# EAGLE board MicroMod_Asset_Tracker_Firmware_Update_Tool-Panel (EAGLE 9.6.2), part 1 of 2
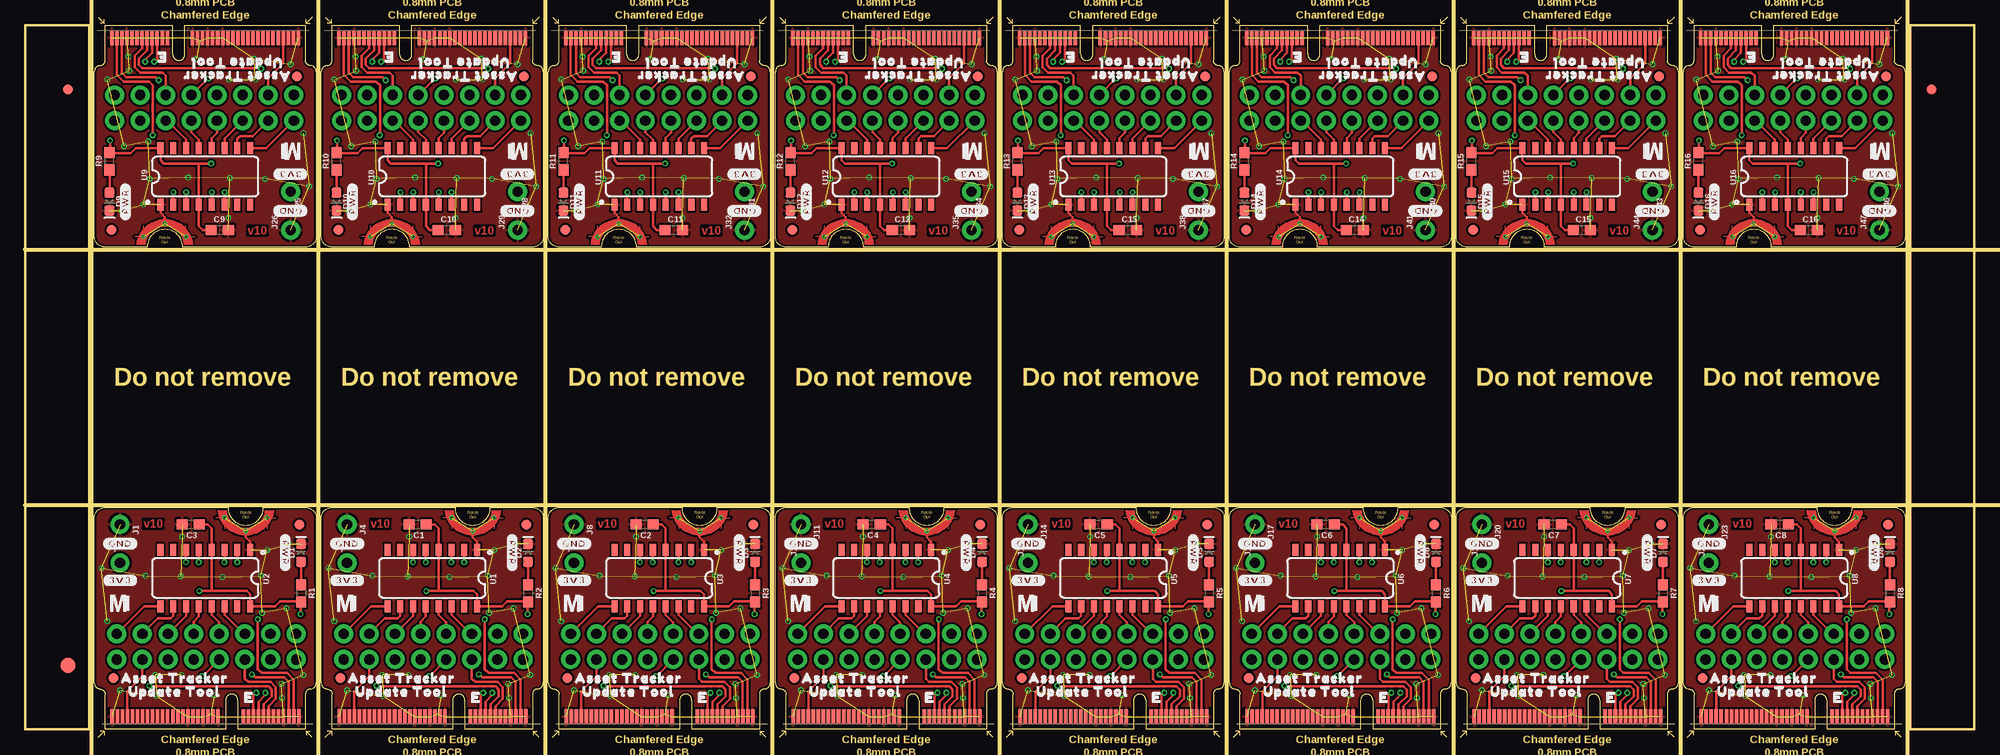
[diagram p0: board, top side]
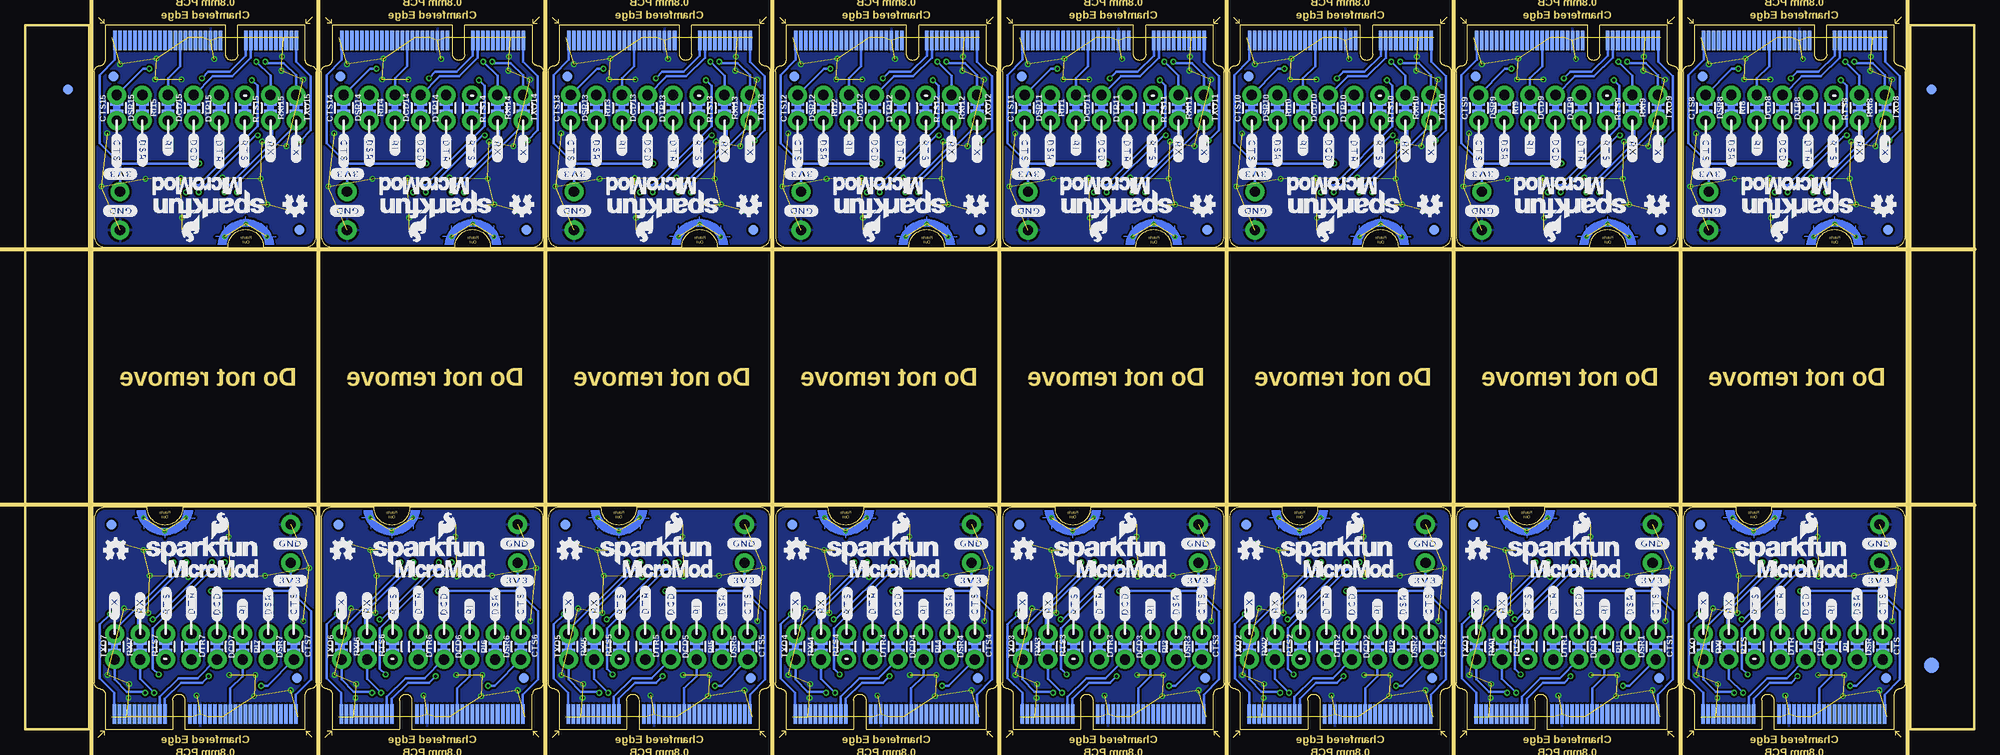
[diagram p1: board, bottom side, seen from below]

Size 193.27 x 69.85 mm. Coordinates in mm from the lower left corner, seen from the top.
Outline: 328 segments
Copper layers (1+2*15+16): Top 0.035mm / dielectric 0.2mm / Route2 0.0175mm / dielectric 1.065mm / Route15 0.0175mm / dielectric 0.2mm / Bottom 0.035mm
Design rules "MicroMod_Asset_Tracker_Firmware_Update_Tool": minimum track width 5mil, minimum drill 0.2mm, track to track 5mil, track to pad 0.2mm, pad to pad 5mil, via to via 0.2mm, smd to smd 0mil, copper to edge 0.2mm, drill to drill 10mil, minimum pad ring 0.13mm, minimum via ring 0.13mm, stop-mask expansion 0.05mm, vias tented up to drill 25mil, thermal gap 10mil
Net classes: 1 power: width 0.178 mm
Milling: 11 lines

## Footprints (pad centres in the part's own frame; a part is rotated, then mirrored left to right if it is on the bottom)
0603 = smd 1.1 x 1: 1 -0.85,0; 2 0.85,0
COMBO-JUMPER_2_NC_TRACE = smd 0.635 x 1.27: 1 -0.508,0; 2 0.508,0 | drill 1.016 pad 1.88: 3 -1.27,0; 4 1.27,0
LED-0603 = smd 1 x 1: A -0.877,0; C 0.877,0
FIDUCIAL-1X2 = smd 1 x 1: 1 0,0
FIDUCIAL-1.5X3 = smd 1.5 x 1.5: 1 0,0
1X01_NO_SILK = drill 1.016 pad 1.88: 1 0,0
M.2-CARD-E-22 = smd 0.35 x 1.45: 1 9.25,1.275; 3 8.75,1.275; 5 8.25,1.275; 7 7.75,1.275; 9 7.25,1.275; 11 6.75,1.275; 13 6.25,1.275; 15 5.75,1.275; 17 5.25,1.275; 19 4.75,1.275; 21 4.25,1.275; 23 3.75,1.275; 33 1.25,1.275; 35 0.75,1.275; 37 0.25,1.275; 39 -0.25,1.275; 41 -0.75,1.275; 43 -1.25,1.275; 45 -1.75,1.275; 47 -2.25,1.275; 49 -2.75,1.275; 51 -3.25,1.275; 53 -3.75,1.275; 55 -4.25,1.275; 57 -4.75,1.275; 59 -5.25,1.275; 61 -5.75,1.275; 63 -6.25,1.275; 65 -6.75,1.275; 67 -7.25,1.275; 69 -7.75,1.275; 71 -8.25,1.275; 73 -8.75,1.275; 75 -9.25,1.275 | smd 0.35 x 1.95 bottom: 2 9,1.525; 4 8.5,1.525; 6 8,1.525; 8 7.5,1.525; 10 7,1.525; 12 6.5,1.525; 14 6,1.525; 16 5.5,1.525; 18 5,1.525; 20 4.5,1.525; 22 4,1.525; 32 1.5,1.525; 34 1,1.525; 36 0.5,1.525; 38 0,1.525; 40 -0.5,1.525; 42 -1,1.525; 44 -1.5,1.525; 46 -2,1.525; 48 -2.5,1.525; 50 -3,1.525; 52 -3.5,1.525; 54 -4,1.525; 56 -4.5,1.525; 58 -5,1.525; 60 -5.5,1.525; 62 -6,1.525; 64 -6.5,1.525; 66 -7,1.525; 68 -7.5,1.525; 70 -8,1.525; 72 -8.5,1.525; 74 -9,1.525 | drill 0.2: GND1 1.9,21; GND2 4,19.7; GND3 6.1,21
SO016 = smd 0.6 x 1.2: 1 -4.445,-2.8; 2 -3.175,-2.8; 3 -1.905,-2.8; 4 -0.635,-2.8; 5 0.635,-2.8; 6 1.905,-2.8; 7 3.175,-2.8; 8 4.445,-2.8; 9 4.445,2.8; 10 3.175,2.8; 11 1.905,2.8; 12 0.635,2.8; 13 -0.635,2.8; 14 -1.905,2.8; 15 -3.175,2.8; 16 -4.445,2.8

## Placement (x,y rotation side)
C1  0.1uF  [0603]  38.92,20.32 180 top
C2  0.1uF  [0603]  61.43,20.32 180 top
C3  0.1uF  [0603]  16.41,20.32 180 top
C4  0.1uF  [0603]  83.94,20.32 180 top
C5  0.1uF  [0603]  106.45,20.32 180 top
C6  0.1uF  [0603]  128.95,20.32 180 top
C7  0.1uF  [0603]  151.46,20.32 180 top
C8  0.1uF  [0603]  173.97,20.32 180 top
C9  0.1uF  [0603]  19.3,49.53 0 top
C10  0.1uF  [0603]  41.81,49.53 0 top
C11  0.1uF  [0603]  64.32,49.53 0 top
C12  0.1uF  [0603]  86.83,49.53 0 top
C13  0.1uF  [0603]  109.33,49.53 0 top
C14  0.1uF  [0603]  131.84,49.53 0 top
C15  0.1uF  [0603]  154.35,49.53 0 top
C16  0.1uF  [0603]  176.86,49.53 0 top
CTS  JUMPER-COMBO_2_NC_TRACE  [COMBO-JUMPER_2_NC_TRACE]  9.08,8.2 270 bottom
CTS1  JUMPER-COMBO_2_NC_TRACE  [COMBO-JUMPER_2_NC_TRACE]  31.59,8.2 270 bottom
CTS2  JUMPER-COMBO_2_NC_TRACE  [COMBO-JUMPER_2_NC_TRACE]  54.1,8.2 270 bottom
CTS3  JUMPER-COMBO_2_NC_TRACE  [COMBO-JUMPER_2_NC_TRACE]  76.6,8.2 270 bottom
CTS4  JUMPER-COMBO_2_NC_TRACE  [COMBO-JUMPER_2_NC_TRACE]  99.11,8.2 270 bottom
CTS5  JUMPER-COMBO_2_NC_TRACE  [COMBO-JUMPER_2_NC_TRACE]  121.62,8.2 270 bottom
CTS6  JUMPER-COMBO_2_NC_TRACE  [COMBO-JUMPER_2_NC_TRACE]  144.13,8.2 270 bottom
CTS7  JUMPER-COMBO_2_NC_TRACE  [COMBO-JUMPER_2_NC_TRACE]  166.64,8.2 270 bottom
CTS8  JUMPER-COMBO_2_NC_TRACE  [COMBO-JUMPER_2_NC_TRACE]  26.63,61.65 90 bottom
CTS9  JUMPER-COMBO_2_NC_TRACE  [COMBO-JUMPER_2_NC_TRACE]  49.14,61.65 90 bottom
CTS10  JUMPER-COMBO_2_NC_TRACE  [COMBO-JUMPER_2_NC_TRACE]  71.65,61.65 90 bottom
CTS11  JUMPER-COMBO_2_NC_TRACE  [COMBO-JUMPER_2_NC_TRACE]  94.16,61.65 90 bottom
CTS12  JUMPER-COMBO_2_NC_TRACE  [COMBO-JUMPER_2_NC_TRACE]  116.67,61.65 90 bottom
CTS13  JUMPER-COMBO_2_NC_TRACE  [COMBO-JUMPER_2_NC_TRACE]  139.18,61.65 90 bottom
CTS14  JUMPER-COMBO_2_NC_TRACE  [COMBO-JUMPER_2_NC_TRACE]  161.68,61.65 90 bottom
CTS15  JUMPER-COMBO_2_NC_TRACE  [COMBO-JUMPER_2_NC_TRACE]  184.19,61.65 90 bottom
D1  BLUE  [LED-0603]  27.36,17.5 90 top
D2  BLUE  [LED-0603]  49.86,17.5 90 top
D3  BLUE  [LED-0603]  72.37,17.5 90 top
D4  BLUE  [LED-0603]  94.88,17.5 90 top
D5  BLUE  [LED-0603]  117.39,17.5 90 top
D6  BLUE  [LED-0603]  139.9,17.5 90 top
D7  BLUE  [LED-0603]  162.41,17.5 90 top
D8  BLUE  [LED-0603]  184.91,17.5 90 top
D9  BLUE  [LED-0603]  8.36,52.35 270 top
D10  BLUE  [LED-0603]  30.87,52.35 270 top
D11  BLUE  [LED-0603]  53.37,52.35 270 top
D12  BLUE  [LED-0603]  75.88,52.35 270 top
D13  BLUE  [LED-0603]  98.39,52.35 270 top
D14  BLUE  [LED-0603]  120.9,52.35 270 top
D15  BLUE  [LED-0603]  143.41,52.35 270 top
D16  BLUE  [LED-0603]  165.91,52.35 270 top
DCD  JUMPER-COMBO_2_NC_TRACE  [COMBO-JUMPER_2_NC_TRACE]  16.7,8.2 270 bottom
DCD1  JUMPER-COMBO_2_NC_TRACE  [COMBO-JUMPER_2_NC_TRACE]  39.21,8.2 270 bottom
DCD2  JUMPER-COMBO_2_NC_TRACE  [COMBO-JUMPER_2_NC_TRACE]  61.72,8.2 270 bottom
DCD3  JUMPER-COMBO_2_NC_TRACE  [COMBO-JUMPER_2_NC_TRACE]  84.22,8.2 270 bottom
DCD4  JUMPER-COMBO_2_NC_TRACE  [COMBO-JUMPER_2_NC_TRACE]  106.73,8.2 270 bottom
DCD5  JUMPER-COMBO_2_NC_TRACE  [COMBO-JUMPER_2_NC_TRACE]  129.24,8.2 270 bottom
DCD6  JUMPER-COMBO_2_NC_TRACE  [COMBO-JUMPER_2_NC_TRACE]  151.75,8.2 270 bottom
DCD7  JUMPER-COMBO_2_NC_TRACE  [COMBO-JUMPER_2_NC_TRACE]  174.26,8.2 270 bottom
DCD8  JUMPER-COMBO_2_NC_TRACE  [COMBO-JUMPER_2_NC_TRACE]  19.01,61.65 90 bottom
DCD9  JUMPER-COMBO_2_NC_TRACE  [COMBO-JUMPER_2_NC_TRACE]  41.52,61.65 90 bottom
DCD10  JUMPER-COMBO_2_NC_TRACE  [COMBO-JUMPER_2_NC_TRACE]  64.03,61.65 90 bottom
DCD11  JUMPER-COMBO_2_NC_TRACE  [COMBO-JUMPER_2_NC_TRACE]  86.54,61.65 90 bottom
DCD12  JUMPER-COMBO_2_NC_TRACE  [COMBO-JUMPER_2_NC_TRACE]  109.05,61.65 90 bottom
DCD13  JUMPER-COMBO_2_NC_TRACE  [COMBO-JUMPER_2_NC_TRACE]  131.56,61.65 90 bottom
DCD14  JUMPER-COMBO_2_NC_TRACE  [COMBO-JUMPER_2_NC_TRACE]  154.06,61.65 90 bottom
DCD15  JUMPER-COMBO_2_NC_TRACE  [COMBO-JUMPER_2_NC_TRACE]  176.57,61.65 90 bottom
DSR  JUMPER-COMBO_2_NC_TRACE  [COMBO-JUMPER_2_NC_TRACE]  11.62,8.2 270 bottom
DSR1  JUMPER-COMBO_2_NC_TRACE  [COMBO-JUMPER_2_NC_TRACE]  34.13,8.2 270 bottom
DSR2  JUMPER-COMBO_2_NC_TRACE  [COMBO-JUMPER_2_NC_TRACE]  56.64,8.2 270 bottom
DSR3  JUMPER-COMBO_2_NC_TRACE  [COMBO-JUMPER_2_NC_TRACE]  79.14,8.2 270 bottom
DSR4  JUMPER-COMBO_2_NC_TRACE  [COMBO-JUMPER_2_NC_TRACE]  101.65,8.2 270 bottom
DSR5  JUMPER-COMBO_2_NC_TRACE  [COMBO-JUMPER_2_NC_TRACE]  124.16,8.2 270 bottom
DSR6  JUMPER-COMBO_2_NC_TRACE  [COMBO-JUMPER_2_NC_TRACE]  146.67,8.2 270 bottom
DSR7  JUMPER-COMBO_2_NC_TRACE  [COMBO-JUMPER_2_NC_TRACE]  169.18,8.2 270 bottom
DSR8  JUMPER-COMBO_2_NC_TRACE  [COMBO-JUMPER_2_NC_TRACE]  24.09,61.65 90 bottom
DSR9  JUMPER-COMBO_2_NC_TRACE  [COMBO-JUMPER_2_NC_TRACE]  46.6,61.65 90 bottom
DSR10  JUMPER-COMBO_2_NC_TRACE  [COMBO-JUMPER_2_NC_TRACE]  69.11,61.65 90 bottom
DSR11  JUMPER-COMBO_2_NC_TRACE  [COMBO-JUMPER_2_NC_TRACE]  91.62,61.65 90 bottom
DSR12  JUMPER-COMBO_2_NC_TRACE  [COMBO-JUMPER_2_NC_TRACE]  114.13,61.65 90 bottom
DSR13  JUMPER-COMBO_2_NC_TRACE  [COMBO-JUMPER_2_NC_TRACE]  136.64,61.65 90 bottom
DSR14  JUMPER-COMBO_2_NC_TRACE  [COMBO-JUMPER_2_NC_TRACE]  159.14,61.65 90 bottom
DSR15  JUMPER-COMBO_2_NC_TRACE  [COMBO-JUMPER_2_NC_TRACE]  181.65,61.65 90 bottom
DTR  JUMPER-COMBO_2_NC_TRACE  [COMBO-JUMPER_2_NC_TRACE]  19.24,8.2 270 bottom
DTR1  JUMPER-COMBO_2_NC_TRACE  [COMBO-JUMPER_2_NC_TRACE]  41.75,8.2 270 bottom
DTR2  JUMPER-COMBO_2_NC_TRACE  [COMBO-JUMPER_2_NC_TRACE]  64.26,8.2 270 bottom
DTR3  JUMPER-COMBO_2_NC_TRACE  [COMBO-JUMPER_2_NC_TRACE]  86.76,8.2 270 bottom
DTR4  JUMPER-COMBO_2_NC_TRACE  [COMBO-JUMPER_2_NC_TRACE]  109.27,8.2 270 bottom
DTR5  JUMPER-COMBO_2_NC_TRACE  [COMBO-JUMPER_2_NC_TRACE]  131.78,8.2 270 bottom
DTR6  JUMPER-COMBO_2_NC_TRACE  [COMBO-JUMPER_2_NC_TRACE]  154.29,8.2 270 bottom
DTR7  JUMPER-COMBO_2_NC_TRACE  [COMBO-JUMPER_2_NC_TRACE]  176.8,8.2 270 bottom
DTR8  JUMPER-COMBO_2_NC_TRACE  [COMBO-JUMPER_2_NC_TRACE]  16.47,61.65 90 bottom
DTR9  JUMPER-COMBO_2_NC_TRACE  [COMBO-JUMPER_2_NC_TRACE]  38.98,61.65 90 bottom
DTR10  JUMPER-COMBO_2_NC_TRACE  [COMBO-JUMPER_2_NC_TRACE]  61.49,61.65 90 bottom
DTR11  JUMPER-COMBO_2_NC_TRACE  [COMBO-JUMPER_2_NC_TRACE]  84,61.65 90 bottom
DTR12  JUMPER-COMBO_2_NC_TRACE  [COMBO-JUMPER_2_NC_TRACE]  106.51,61.65 90 bottom
DTR13  JUMPER-COMBO_2_NC_TRACE  [COMBO-JUMPER_2_NC_TRACE]  129.02,61.65 90 bottom
DTR14  JUMPER-COMBO_2_NC_TRACE  [COMBO-JUMPER_2_NC_TRACE]  151.52,61.65 90 bottom
DTR15  JUMPER-COMBO_2_NC_TRACE  [COMBO-JUMPER_2_NC_TRACE]  174.03,61.65 90 bottom
E$1  [FIDUCIAL-1X2]  4.23,63.5 0 top
E$2  [FIDUCIAL-1X2]  4.23,63.5 0 bottom
E$3  [FIDUCIAL-1X2]  189.04,63.5 0 top
E$4  [FIDUCIAL-1X2]  189.04,63.5 0 bottom
E$5  [FIDUCIAL-1.5X3]  4.23,6.35 0 top
E$6  [FIDUCIAL-1.5X3]  4.23,6.35 0 bottom
J1  [1X01_NO_SILK]  9.4,20.32 270 top
J2  [1X01_NO_SILK]  9.4,16.51 270 top
J3  [1X01_NO_SILK]  31.9,16.51 270 top
J4  [1X01_NO_SILK]  31.9,20.32 270 top
J5  MICROMOD-2222  [M.2-CARD-E-22]  17.88,-0.01 0 top
J6  MICROMOD-2222  [M.2-CARD-E-22]  40.38,-0.01 0 top
J7  [1X01_NO_SILK]  54.41,16.51 270 top
J8  [1X01_NO_SILK]  54.41,20.32 270 top
J9  MICROMOD-2222  [M.2-CARD-E-22]  62.89,-0.01 0 top
J10  [1X01_NO_SILK]  76.92,16.51 270 top
J11  [1X01_NO_SILK]  76.92,20.32 270 top
J12  MICROMOD-2222  [M.2-CARD-E-22]  85.4,-0.01 0 top
J13  [1X01_NO_SILK]  99.43,16.51 270 top
J14  [1X01_NO_SILK]  99.43,20.32 270 top
J15  MICROMOD-2222  [M.2-CARD-E-22]  107.91,-0.01 0 top
J16  [1X01_NO_SILK]  121.94,16.51 270 top
J17  [1X01_NO_SILK]  121.94,20.32 270 top
J18  MICROMOD-2222  [M.2-CARD-E-22]  130.42,-0.01 0 top
J19  [1X01_NO_SILK]  144.45,16.51 270 top
J20  [1X01_NO_SILK]  144.45,20.32 270 top
J21  MICROMOD-2222  [M.2-CARD-E-22]  152.93,-0.01 0 top
J22  [1X01_NO_SILK]  166.95,16.51 270 top
J23  [1X01_NO_SILK]  166.95,20.32 270 top
J24  MICROMOD-2222  [M.2-CARD-E-22]  175.43,-0.01 0 top
J25  [1X01_NO_SILK]  26.32,53.34 90 top
J26  [1X01_NO_SILK]  26.32,49.53 90 top
J27  MICROMOD-2222  [M.2-CARD-E-22]  17.84,69.86 180 top
J28  [1X01_NO_SILK]  48.83,53.34 90 top
J29  [1X01_NO_SILK]  48.83,49.53 90 top
J30  MICROMOD-2222  [M.2-CARD-E-22]  40.35,69.86 180 top
J31  [1X01_NO_SILK]  71.33,53.34 90 top
J32  [1X01_NO_SILK]  71.33,49.53 90 top
J33  MICROMOD-2222  [M.2-CARD-E-22]  62.85,69.86 180 top
J34  [1X01_NO_SILK]  93.84,53.34 90 top
J35  [1X01_NO_SILK]  93.84,49.53 90 top
J36  MICROMOD-2222  [M.2-CARD-E-22]  85.36,69.86 180 top
J37  [1X01_NO_SILK]  116.35,53.34 90 top
J38  [1X01_NO_SILK]  116.35,49.53 90 top
J39  MICROMOD-2222  [M.2-CARD-E-22]  107.87,69.86 180 top
J40  [1X01_NO_SILK]  138.86,53.34 90 top
J41  [1X01_NO_SILK]  138.86,49.53 90 top
J42  MICROMOD-2222  [M.2-CARD-E-22]  130.38,69.86 180 top
J43  [1X01_NO_SILK]  161.37,53.34 90 top
J44  [1X01_NO_SILK]  161.37,49.53 90 top
J45  MICROMOD-2222  [M.2-CARD-E-22]  152.89,69.86 180 top
J46  [1X01_NO_SILK]  183.87,53.34 90 top
J47  [1X01_NO_SILK]  183.87,49.53 90 top
J48  MICROMOD-2222  [M.2-CARD-E-22]  175.39,69.86 180 top
JP1  FIDUCIAL1X2  [FIDUCIAL-1X2]  31.27,5.08 0 top
JP2  FIDUCIAL1X2  [FIDUCIAL-1X2]  49.68,20.32 0 top
JP3  FIDUCIAL1X2  [FIDUCIAL-1X2]  8.76,5.08 0 top
JP4  FIDUCIAL1X2  [FIDUCIAL-1X2]  27.18,20.32 0 top
JP5  FIDUCIAL1X2  [FIDUCIAL-1X2]  27.18,20.32 0 bottom
JP6  FIDUCIAL1X2  [FIDUCIAL-1X2]  8.76,5.08 0 bottom
JP7  FIDUCIAL1X2  [FIDUCIAL-1X2]  49.68,20.32 0 bottom
JP8  FIDUCIAL1X2  [FIDUCIAL-1X2]  31.27,5.08 0 bottom
JP9  FIDUCIAL1X2  [FIDUCIAL-1X2]  53.78,5.08 0 top
JP10  FIDUCIAL1X2  [FIDUCIAL-1X2]  72.19,20.32 0 top
JP11  FIDUCIAL1X2  [FIDUCIAL-1X2]  72.19,20.32 0 bottom
JP12  FIDUCIAL1X2  [FIDUCIAL-1X2]  53.78,5.08 0 bottom
JP13  FIDUCIAL1X2  [FIDUCIAL-1X2]  76.29,5.08 0 top
JP14  FIDUCIAL1X2  [FIDUCIAL-1X2]  94.7,20.32 0 top
JP15  FIDUCIAL1X2  [FIDUCIAL-1X2]  94.7,20.32 0 bottom
JP16  FIDUCIAL1X2  [FIDUCIAL-1X2]  76.29,5.08 0 bottom
JP17  FIDUCIAL1X2  [FIDUCIAL-1X2]  98.8,5.08 0 top
JP18  FIDUCIAL1X2  [FIDUCIAL-1X2]  117.21,20.32 0 top
JP19  FIDUCIAL1X2  [FIDUCIAL-1X2]  117.21,20.32 0 bottom
JP20  FIDUCIAL1X2  [FIDUCIAL-1X2]  98.8,5.08 0 bottom
JP21  FIDUCIAL1X2  [FIDUCIAL-1X2]  121.3,5.08 0 top
JP22  FIDUCIAL1X2  [FIDUCIAL-1X2]  139.72,20.32 0 top
JP23  FIDUCIAL1X2  [FIDUCIAL-1X2]  139.72,20.32 0 bottom
JP24  FIDUCIAL1X2  [FIDUCIAL-1X2]  121.3,5.08 0 bottom
JP25  FIDUCIAL1X2  [FIDUCIAL-1X2]  143.81,5.08 0 top
JP26  FIDUCIAL1X2  [FIDUCIAL-1X2]  162.23,20.32 0 top
JP27  FIDUCIAL1X2  [FIDUCIAL-1X2]  162.23,20.32 0 bottom
JP28  FIDUCIAL1X2  [FIDUCIAL-1X2]  143.81,5.08 0 bottom
JP29  FIDUCIAL1X2  [FIDUCIAL-1X2]  166.32,5.08 0 top
JP30  FIDUCIAL1X2  [FIDUCIAL-1X2]  184.73,20.32 0 top
JP31  FIDUCIAL1X2  [FIDUCIAL-1X2]  184.73,20.32 0 bottom
JP32  FIDUCIAL1X2  [FIDUCIAL-1X2]  166.32,5.08 0 bottom
JP33  FIDUCIAL1X2  [FIDUCIAL-1X2]  26.95,64.77 180 top
JP34  FIDUCIAL1X2  [FIDUCIAL-1X2]  8.54,49.53 180 top
JP35  FIDUCIAL1X2  [FIDUCIAL-1X2]  8.54,49.53 180 bottom
JP36  FIDUCIAL1X2  [FIDUCIAL-1X2]  26.95,64.77 180 bottom
JP37  FIDUCIAL1X2  [FIDUCIAL-1X2]  49.46,64.77 180 top
JP38  FIDUCIAL1X2  [FIDUCIAL-1X2]  31.05,49.53 180 top
JP39  FIDUCIAL1X2  [FIDUCIAL-1X2]  31.05,49.53 180 bottom
JP40  FIDUCIAL1X2  [FIDUCIAL-1X2]  49.46,64.77 180 bottom
JP41  FIDUCIAL1X2  [FIDUCIAL-1X2]  71.97,64.77 180 top
JP42  FIDUCIAL1X2  [FIDUCIAL-1X2]  53.55,49.53 180 top
JP43  FIDUCIAL1X2  [FIDUCIAL-1X2]  53.55,49.53 180 bottom
JP44  FIDUCIAL1X2  [FIDUCIAL-1X2]  71.97,64.77 180 bottom
JP45  FIDUCIAL1X2  [FIDUCIAL-1X2]  94.48,64.77 180 top
JP46  FIDUCIAL1X2  [FIDUCIAL-1X2]  76.06,49.53 180 top
JP47  FIDUCIAL1X2  [FIDUCIAL-1X2]  76.06,49.53 180 bottom
JP48  FIDUCIAL1X2  [FIDUCIAL-1X2]  94.48,64.77 180 bottom
JP49  FIDUCIAL1X2  [FIDUCIAL-1X2]  116.98,64.77 180 top
JP50  FIDUCIAL1X2  [FIDUCIAL-1X2]  98.57,49.53 180 top
JP51  FIDUCIAL1X2  [FIDUCIAL-1X2]  98.57,49.53 180 bottom
JP52  FIDUCIAL1X2  [FIDUCIAL-1X2]  116.98,64.77 180 bottom
JP53  FIDUCIAL1X2  [FIDUCIAL-1X2]  139.49,64.77 180 top
JP54  FIDUCIAL1X2  [FIDUCIAL-1X2]  121.08,49.53 180 top
JP55  FIDUCIAL1X2  [FIDUCIAL-1X2]  121.08,49.53 180 bottom
JP56  FIDUCIAL1X2  [FIDUCIAL-1X2]  139.49,64.77 180 bottom
JP57  FIDUCIAL1X2  [FIDUCIAL-1X2]  162,64.77 180 top
JP58  FIDUCIAL1X2  [FIDUCIAL-1X2]  143.59,49.53 180 top
JP59  FIDUCIAL1X2  [FIDUCIAL-1X2]  143.59,49.53 180 bottom
JP60  FIDUCIAL1X2  [FIDUCIAL-1X2]  162,64.77 180 bottom
JP61  FIDUCIAL1X2  [FIDUCIAL-1X2]  184.51,64.77 180 top
JP62  FIDUCIAL1X2  [FIDUCIAL-1X2]  166.09,49.53 180 top
JP63  FIDUCIAL1X2  [FIDUCIAL-1X2]  166.09,49.53 180 bottom
JP64  FIDUCIAL1X2  [FIDUCIAL-1X2]  184.51,64.77 180 bottom
LOGO1  OSHW-LOGOMINI  [OSHW-LOGO-MINI]  26.75,17.78 0 bottom
LOGO2  OSHW-LOGOMINI  [OSHW-LOGO-MINI]  49.25,17.78 0 bottom
LOGO3  SFE_LOGO_NAME_FLAME.1_INCH  [SFE_LOGO_NAME_FLAME_.1]  18.13,17.78 0 bottom
LOGO4  SFE_LOGO_NAME_FLAME.1_INCH  [SFE_LOGO_NAME_FLAME_.1]  40.63,17.78 0 bottom
LOGO5  OSHW-LOGOMINI  [OSHW-LOGO-MINI]  71.76,17.78 0 bottom
LOGO6  SFE_LOGO_NAME_FLAME.1_INCH  [SFE_LOGO_NAME_FLAME_.1]  63.14,17.78 0 bottom
LOGO7  OSHW-LOGOMINI  [OSHW-LOGO-MINI]  94.27,17.78 0 bottom
LOGO8  SFE_LOGO_NAME_FLAME.1_INCH  [SFE_LOGO_NAME_FLAME_.1]  85.65,17.78 0 bottom
LOGO9  OSHW-LOGOMINI  [OSHW-LOGO-MINI]  116.78,17.78 0 bottom
LOGO10  SFE_LOGO_NAME_FLAME.1_INCH  [SFE_LOGO_NAME_FLAME_.1]  108.16,17.78 0 bottom
LOGO11  OSHW-LOGOMINI  [OSHW-LOGO-MINI]  139.29,17.78 0 bottom
LOGO12  SFE_LOGO_NAME_FLAME.1_INCH  [SFE_LOGO_NAME_FLAME_.1]  130.67,17.78 0 bottom
LOGO13  OSHW-LOGOMINI  [OSHW-LOGO-MINI]  161.8,17.78 0 bottom
LOGO14  SFE_LOGO_NAME_FLAME.1_INCH  [SFE_LOGO_NAME_FLAME_.1]  153.18,17.78 0 bottom
LOGO15  OSHW-LOGOMINI  [OSHW-LOGO-MINI]  184.3,17.78 0 bottom
LOGO16  SFE_LOGO_NAME_FLAME.1_INCH  [SFE_LOGO_NAME_FLAME_.1]  175.68,17.78 0 bottom
LOGO17  OSHW-LOGOMINI  [OSHW-LOGO-MINI]  8.97,52.07 180 bottom
LOGO18  SFE_LOGO_NAME_FLAME.1_INCH  [SFE_LOGO_NAME_FLAME_.1]  17.59,52.07 180 bottom
LOGO19  OSHW-LOGOMINI  [OSHW-LOGO-MINI]  31.48,52.07 180 bottom
LOGO20  SFE_LOGO_NAME_FLAME.1_INCH  [SFE_LOGO_NAME_FLAME_.1]  40.1,52.07 180 bottom
LOGO21  OSHW-LOGOMINI  [OSHW-LOGO-MINI]  53.99,52.07 180 bottom
LOGO22  SFE_LOGO_NAME_FLAME.1_INCH  [SFE_LOGO_NAME_FLAME_.1]  62.6,52.07 180 bottom
LOGO23  OSHW-LOGOMINI  [OSHW-LOGO-MINI]  76.49,52.07 180 bottom
LOGO24  SFE_LOGO_NAME_FLAME.1_INCH  [SFE_LOGO_NAME_FLAME_.1]  85.11,52.07 180 bottom
LOGO25  OSHW-LOGOMINI  [OSHW-LOGO-MINI]  99,52.07 180 bottom
LOGO26  SFE_LOGO_NAME_FLAME.1_INCH  [SFE_LOGO_NAME_FLAME_.1]  107.62,52.07 180 bottom
LOGO27  OSHW-LOGOMINI  [OSHW-LOGO-MINI]  121.51,52.07 180 bottom
LOGO28  SFE_LOGO_NAME_FLAME.1_INCH  [SFE_LOGO_NAME_FLAME_.1]  130.13,52.07 180 bottom
LOGO29  OSHW-LOGOMINI  [OSHW-LOGO-MINI]  144.02,52.07 180 bottom
LOGO30  SFE_LOGO_NAME_FLAME.1_INCH  [SFE_LOGO_NAME_FLAME_.1]  152.64,52.07 180 bottom
LOGO31  OSHW-LOGOMINI  [OSHW-LOGO-MINI]  166.52,52.07 180 bottom
LOGO32  SFE_LOGO_NAME_FLAME.1_INCH  [SFE_LOGO_NAME_FLAME_.1]  175.14,52.07 180 bottom
R1  1k  [0603]  27.36,13.5 270 top
R2  1k  [0603]  49.86,13.5 270 top
R3  1k  [0603]  72.37,13.5 270 top
R4  1k  [0603]  94.88,13.5 270 top
R5  1k  [0603]  117.39,13.5 270 top
R6  1k  [0603]  139.9,13.5 270 top
R7  1k  [0603]  162.41,13.5 270 top
R8  1k  [0603]  184.91,13.5 270 top
R9  1k  [0603]  8.36,56.35 90 top
R10  1k  [0603]  30.87,56.35 90 top
R11  1k  [0603]  53.37,56.35 90 top
R12  1k  [0603]  75.88,56.35 90 top
R13  1k  [0603]  98.39,56.35 90 top
R14  1k  [0603]  120.9,56.35 90 top
R15  1k  [0603]  143.41,56.35 90 top
R16  1k  [0603]  165.91,56.35 90 top
RI  JUMPER-COMBO_2_NC_TRACE  [COMBO-JUMPER_2_NC_TRACE]  14.16,8.2 270 bottom
RI1  JUMPER-COMBO_2_NC_TRACE  [COMBO-JUMPER_2_NC_TRACE]  36.67,8.2 270 bottom
RI2  JUMPER-COMBO_2_NC_TRACE  [COMBO-JUMPER_2_NC_TRACE]  59.18,8.2 270 bottom
RI3  JUMPER-COMBO_2_NC_TRACE  [COMBO-JUMPER_2_NC_TRACE]  81.68,8.2 270 bottom
RI4  JUMPER-COMBO_2_NC_TRACE  [COMBO-JUMPER_2_NC_TRACE]  104.19,8.2 270 bottom
RI5  JUMPER-COMBO_2_NC_TRACE  [COMBO-JUMPER_2_NC_TRACE]  126.7,8.2 270 bottom
RI6  JUMPER-COMBO_2_NC_TRACE  [COMBO-JUMPER_2_NC_TRACE]  149.21,8.2 270 bottom
RI7  JUMPER-COMBO_2_NC_TRACE  [COMBO-JUMPER_2_NC_TRACE]  171.72,8.2 270 bottom
RI8  JUMPER-COMBO_2_NC_TRACE  [COMBO-JUMPER_2_NC_TRACE]  21.55,61.65 90 bottom
RI9  JUMPER-COMBO_2_NC_TRACE  [COMBO-JUMPER_2_NC_TRACE]  44.06,61.65 90 bottom
RI10  JUMPER-COMBO_2_NC_TRACE  [COMBO-JUMPER_2_NC_TRACE]  66.57,61.65 90 bottom
RI11  JUMPER-COMBO_2_NC_TRACE  [COMBO-JUMPER_2_NC_TRACE]  89.08,61.65 90 bottom
RI12  JUMPER-COMBO_2_NC_TRACE  [COMBO-JUMPER_2_NC_TRACE]  111.59,61.65 90 bottom
RI13  JUMPER-COMBO_2_NC_TRACE  [COMBO-JUMPER_2_NC_TRACE]  134.1,61.65 90 bottom
RI14  JUMPER-COMBO_2_NC_TRACE  [COMBO-JUMPER_2_NC_TRACE]  156.6,61.65 90 bottom
RI15  JUMPER-COMBO_2_NC_TRACE  [COMBO-JUMPER_2_NC_TRACE]  179.11,61.65 90 bottom
RTS  JUMPER-COMBO_2_NC_TRACE  [COMBO-JUMPER_2_NC_TRACE]  21.78,8.2 270 bottom
RTS1  JUMPER-COMBO_2_NC_TRACE  [COMBO-JUMPER_2_NC_TRACE]  44.29,8.2 270 bottom
RTS2  JUMPER-COMBO_2_NC_TRACE  [COMBO-JUMPER_2_NC_TRACE]  66.8,8.2 270 bottom
RTS3  JUMPER-COMBO_2_NC_TRACE  [COMBO-JUMPER_2_NC_TRACE]  89.3,8.2 270 bottom
RTS4  JUMPER-COMBO_2_NC_TRACE  [COMBO-JUMPER_2_NC_TRACE]  111.81,8.2 270 bottom
RTS5  JUMPER-COMBO_2_NC_TRACE  [COMBO-JUMPER_2_NC_TRACE]  134.32,8.2 270 bottom
RTS6  JUMPER-COMBO_2_NC_TRACE  [COMBO-JUMPER_2_NC_TRACE]  156.83,8.2 270 bottom
RTS7  JUMPER-COMBO_2_NC_TRACE  [COMBO-JUMPER_2_NC_TRACE]  179.34,8.2 270 bottom
RTS8  JUMPER-COMBO_2_NC_TRACE  [COMBO-JUMPER_2_NC_TRACE]  13.93,61.65 90 bottom
RTS9  JUMPER-COMBO_2_NC_TRACE  [COMBO-JUMPER_2_NC_TRACE]  36.44,61.65 90 bottom
RTS10  JUMPER-COMBO_2_NC_TRACE  [COMBO-JUMPER_2_NC_TRACE]  58.95,61.65 90 bottom
RTS11  JUMPER-COMBO_2_NC_TRACE  [COMBO-JUMPER_2_NC_TRACE]  81.46,61.65 90 bottom
RTS12  JUMPER-COMBO_2_NC_TRACE  [COMBO-JUMPER_2_NC_TRACE]  103.97,61.65 90 bottom
RTS13  JUMPER-COMBO_2_NC_TRACE  [COMBO-JUMPER_2_NC_TRACE]  126.48,61.65 90 bottom
RTS14  JUMPER-COMBO_2_NC_TRACE  [COMBO-JUMPER_2_NC_TRACE]  148.98,61.65 90 bottom
RTS15  JUMPER-COMBO_2_NC_TRACE  [COMBO-JUMPER_2_NC_TRACE]  171.49,61.65 90 bottom
RXI  JUMPER-COMBO_2_NC_TRACE  [COMBO-JUMPER_2_NC_TRACE]  24.32,8.2 270 bottom
RXI1  JUMPER-COMBO_2_NC_TRACE  [COMBO-JUMPER_2_NC_TRACE]  46.83,8.2 270 bottom
RXI2  JUMPER-COMBO_2_NC_TRACE  [COMBO-JUMPER_2_NC_TRACE]  69.34,8.2 270 bottom
RXI3  JUMPER-COMBO_2_NC_TRACE  [COMBO-JUMPER_2_NC_TRACE]  91.84,8.2 270 bottom
RXI4  JUMPER-COMBO_2_NC_TRACE  [COMBO-JUMPER_2_NC_TRACE]  114.35,8.2 270 bottom
RXI5  JUMPER-COMBO_2_NC_TRACE  [COMBO-JUMPER_2_NC_TRACE]  136.86,8.2 270 bottom
RXI6  JUMPER-COMBO_2_NC_TRACE  [COMBO-JUMPER_2_NC_TRACE]  159.37,8.2 270 bottom
RXI7  JUMPER-COMBO_2_NC_TRACE  [COMBO-JUMPER_2_NC_TRACE]  181.88,8.2 270 bottom
RXI8  JUMPER-COMBO_2_NC_TRACE  [COMBO-JUMPER_2_NC_TRACE]  11.39,61.65 90 bottom
RXI9  JUMPER-COMBO_2_NC_TRACE  [COMBO-JUMPER_2_NC_TRACE]  33.9,61.65 90 bottom
RXI10  JUMPER-COMBO_2_NC_TRACE  [COMBO-JUMPER_2_NC_TRACE]  56.41,61.65 90 bottom
RXI11  JUMPER-COMBO_2_NC_TRACE  [COMBO-JUMPER_2_NC_TRACE]  78.92,61.65 90 bottom
RXI12  JUMPER-COMBO_2_NC_TRACE  [COMBO-JUMPER_2_NC_TRACE]  101.43,61.65 90 bottom
RXI13  JUMPER-COMBO_2_NC_TRACE  [COMBO-JUMPER_2_NC_TRACE]  123.94,61.65 90 bottom
RXI14  JUMPER-COMBO_2_NC_TRACE  [COMBO-JUMPER_2_NC_TRACE]  146.44,61.65 90 bottom
RXI15  JUMPER-COMBO_2_NC_TRACE  [COMBO-JUMPER_2_NC_TRACE]  168.95,61.65 90 bottom
TXO  JUMPER-COMBO_2_NC_TRACE  [COMBO-JUMPER_2_NC_TRACE]  26.86,8.2 270 bottom
TXO1  JUMPER-COMBO_2_NC_TRACE  [COMBO-JUMPER_2_NC_TRACE]  49.37,8.2 270 bottom
TXO2  JUMPER-COMBO_2_NC_TRACE  [COMBO-JUMPER_2_NC_TRACE]  71.88,8.2 270 bottom
TXO3  JUMPER-COMBO_2_NC_TRACE  [COMBO-JUMPER_2_NC_TRACE]  94.38,8.2 270 bottom
TXO4  JUMPER-COMBO_2_NC_TRACE  [COMBO-JUMPER_2_NC_TRACE]  116.89,8.2 270 bottom
TXO5  JUMPER-COMBO_2_NC_TRACE  [COMBO-JUMPER_2_NC_TRACE]  139.4,8.2 270 bottom
TXO6  JUMPER-COMBO_2_NC_TRACE  [COMBO-JUMPER_2_NC_TRACE]  161.91,8.2 270 bottom
TXO7  JUMPER-COMBO_2_NC_TRACE  [COMBO-JUMPER_2_NC_TRACE]  184.42,8.2 270 bottom
TXO8  JUMPER-COMBO_2_NC_TRACE  [COMBO-JUMPER_2_NC_TRACE]  8.85,61.65 90 bottom
TXO9  JUMPER-COMBO_2_NC_TRACE  [COMBO-JUMPER_2_NC_TRACE]  31.36,61.65 90 bottom
TXO10  JUMPER-COMBO_2_NC_TRACE  [COMBO-JUMPER_2_NC_TRACE]  53.87,61.65 90 bottom
TXO11  JUMPER-COMBO_2_NC_TRACE  [COMBO-JUMPER_2_NC_TRACE]  76.38,61.65 90 bottom
TXO12  JUMPER-COMBO_2_NC_TRACE  [COMBO-JUMPER_2_NC_TRACE]  98.89,61.65 90 bottom
TXO13  JUMPER-COMBO_2_NC_TRACE  [COMBO-JUMPER_2_NC_TRACE]  121.4,61.65 90 bottom
TXO14  JUMPER-COMBO_2_NC_TRACE  [COMBO-JUMPER_2_NC_TRACE]  143.9,61.65 90 bottom
TXO15  JUMPER-COMBO_2_NC_TRACE  [COMBO-JUMPER_2_NC_TRACE]  166.41,61.65 90 bottom
U1  CH340C  [SO016]  40.36,15 180 top
U2  CH340C  [SO016]  17.86,15 180 top
U3  CH340C  [SO016]  62.87,15 180 top
U4  CH340C  [SO016]  85.38,15 180 top
U5  CH340C  [SO016]  107.89,15 180 top
U6  CH340C  [SO016]  130.4,15 180 top
U7  CH340C  [SO016]  152.91,15 180 top
U8  CH340C  [SO016]  175.41,15 180 top
U9  CH340C  [SO016]  17.86,54.85 0 top
U10  CH340C  [SO016]  40.37,54.85 0 top
U11  CH340C  [SO016]  62.88,54.85 0 top
U12  CH340C  [SO016]  85.38,54.85 0 top
U13  CH340C  [SO016]  107.89,54.85 0 top
U14  CH340C  [SO016]  130.4,54.85 0 top
U15  CH340C  [SO016]  152.91,54.85 0 top
U16  CH340C  [SO016]  175.41,54.85 0 top
U$1  [#TX#0]  26.86,12.26 90 bottom
U$2  [#RX#0]  24.32,12.26 90 bottom
U$3  [#GND#2]  9.42,18.41 0 top
U$4  [#DTR#0]  19.24,12.51 90 bottom
U$5  [#RI#0]  14.16,11.87 90 bottom
U$6  [#3V3#3]  9.43,14.76 0 bottom
U$7  [#GND#2]  9.42,18.41 0 bottom
U$8  [#PWR#0]  25.78,17.53 270 top
U$9  [MICROMOD_MI_LOGO_.35]  9.35,12.52 0 top
U$10  [ASSET_TRACKER0]  14.81,5.08 0 top
U$11  [UPDATE_TOOL0]  14.8,3.75 0 top
U$12  [MICROMOD_LOGO_.35]  17.1,15.91 0 bottom
U$13  [#GND#2]  31.93,18.41 0 top
U$14  [#CTS#0]  9.08,12.45 90 bottom
U$15  [#3V3#3]  31.93,14.77 0 top
U$16  [#CTS#0]  31.59,12.45 90 bottom
U$17  [#3V3#3]  9.43,14.77 0 top
U$18  [#DSR#0]  11.62,12.39 90 bottom
U$19  [#DSR#0]  34.13,12.39 90 bottom
U$20  [#RTS#0]  21.72,12.45 90 bottom
U$21  [#RTS#0]  44.22,12.45 90 bottom
U$22  [#DCD#0]  39.21,12.45 90 bottom
U$23  [#DCD#0]  16.7,12.45 90 bottom
U$24  [#TX#0]  49.37,12.26 90 bottom
U$25  [#RX#0]  46.83,12.26 90 bottom
U$26  [#DTR#0]  41.75,12.51 90 bottom
U$27  [#RI#0]  36.67,11.87 90 bottom
U$28  [#3V3#3]  31.94,14.76 0 bottom
U$29  [#GND#2]  31.93,18.41 0 bottom
U$30  [#PWR#0]  48.29,17.53 270 top
U$31  [MICROMOD_MI_LOGO_.35]  31.85,12.52 0 top
U$32  [ASSET_TRACKER0]  37.32,5.08 0 top
U$33  [UPDATE_TOOL0]  37.3,3.75 0 top
U$34  [MICROMOD_LOGO_.35]  39.61,15.91 0 bottom
U$35  [#GND#2]  54.44,18.41 0 top
U$36  [#3V3#3]  54.44,14.77 0 top
U$37  [#CTS#0]  54.1,12.45 90 bottom
U$38  [#DSR#0]  56.64,12.39 90 bottom
U$39  [#RTS#0]  66.73,12.45 90 bottom
U$40  [#DCD#0]  61.72,12.45 90 bottom
U$41  [#TX#0]  71.88,12.26 90 bottom
U$42  [#RX#0]  69.34,12.26 90 bottom
U$43  [#DTR#0]  64.26,12.51 90 bottom
U$44  [#RI#0]  59.18,11.87 90 bottom
U$45  [#3V3#3]  54.45,14.76 0 bottom
U$46  [#GND#2]  54.44,18.41 0 bottom
U$47  [#PWR#0]  70.8,17.53 270 top
U$48  [MICROMOD_MI_LOGO_.35]  54.36,12.52 0 top
U$49  [ASSET_TRACKER0]  59.82,5.08 0 top
U$50  [UPDATE_TOOL0]  59.81,3.75 0 top
U$51  [MICROMOD_LOGO_.35]  62.12,15.91 0 bottom
U$52  [#GND#2]  76.94,18.41 0 top
U$53  [#3V3#3]  76.95,14.77 0 top
U$54  [#CTS#0]  76.6,12.45 90 bottom
U$55  [#DSR#0]  79.14,12.39 90 bottom
U$56  [#RTS#0]  89.24,12.45 90 bottom
U$57  [#DCD#0]  84.22,12.45 90 bottom
U$58  [#TX#0]  94.38,12.26 90 bottom
U$59  [#RX#0]  91.84,12.26 90 bottom
U$60  [#DTR#0]  86.76,12.51 90 bottom
U$61  [#RI#0]  81.68,11.87 90 bottom
U$62  [#3V3#3]  76.96,14.76 0 bottom
U$63  [#GND#2]  76.94,18.41 0 bottom
U$64  [#PWR#0]  93.3,17.53 270 top
U$65  [MICROMOD_MI_LOGO_.35]  76.87,12.52 0 top
U$66  [ASSET_TRACKER0]  82.33,5.08 0 top
U$67  [UPDATE_TOOL0]  82.32,3.75 0 top
U$68  [MICROMOD_LOGO_.35]  84.63,15.91 0 bottom
U$69  [#GND#2]  99.45,18.41 0 top
U$70  [#3V3#3]  99.46,14.77 0 top
U$71  [#CTS#0]  99.11,12.45 90 bottom
U$72  [#DSR#0]  101.65,12.39 90 bottom
U$73  [#RTS#0]  111.75,12.45 90 bottom
U$74  [#DCD#0]  106.73,12.45 90 bottom
U$75  [#TX#0]  116.89,12.26 90 bottom
U$76  [#RX#0]  114.35,12.26 90 bottom
U$77  [#DTR#0]  109.27,12.51 90 bottom
U$78  [#RI#0]  104.19,11.87 90 bottom
U$79  [#3V3#3]  99.47,14.76 0 bottom
U$80  [#GND#2]  99.45,18.41 0 bottom
U$81  [#PWR#0]  115.81,17.53 270 top
U$82  [MICROMOD_MI_LOGO_.35]  99.38,12.52 0 top
U$83  [ASSET_TRACKER0]  104.84,5.08 0 top
U$84  [UPDATE_TOOL0]  104.83,3.75 0 top
U$85  [MICROMOD_LOGO_.35]  107.14,15.91 0 bottom
U$86  [#GND#2]  121.96,18.41 0 top
U$87  [#3V3#3]  121.97,14.77 0 top
U$88  [#CTS#0]  121.62,12.45 90 bottom
U$89  [#DSR#0]  124.16,12.39 90 bottom
U$90  [#RTS#0]  134.26,12.45 90 bottom
U$91  [#DCD#0]  129.24,12.45 90 bottom
U$92  [#TX#0]  139.4,12.26 90 bottom
U$93  [#RX#0]  136.86,12.26 90 bottom
U$94  [#DTR#0]  131.78,12.51 90 bottom
U$95  [#RI#0]  126.7,11.87 90 bottom
U$96  [#3V3#3]  121.97,14.76 0 bottom
U$97  [#GND#2]  121.96,18.41 0 bottom
U$98  [#PWR#0]  138.32,17.53 270 top
U$99  [MICROMOD_MI_LOGO_.35]  121.89,12.52 0 top
U$100  [ASSET_TRACKER0]  127.35,5.08 0 top
U$101  [UPDATE_TOOL0]  127.34,3.75 0 top
U$102  [MICROMOD_LOGO_.35]  129.64,15.91 0 bottom
U$103  [#GND#2]  144.47,18.41 0 top
U$104  [#3V3#3]  144.47,14.77 0 top
U$105  [#CTS#0]  144.13,12.45 90 bottom
U$106  [#DSR#0]  146.67,12.39 90 bottom
U$107  [#RTS#0]  156.77,12.45 90 bottom
U$108  [#DCD#0]  151.75,12.45 90 bottom
U$109  [#TX#0]  161.91,12.26 90 bottom
U$110  [#RX#0]  159.37,12.26 90 bottom
U$111  [#DTR#0]  154.29,12.51 90 bottom
U$112  [#RI#0]  149.21,11.87 90 bottom
U$113  [#3V3#3]  144.48,14.76 0 bottom
U$114  [#GND#2]  144.47,18.41 0 bottom
U$115  [#PWR#0]  160.83,17.53 270 top
U$116  [MICROMOD_MI_LOGO_.35]  144.4,12.52 0 top
U$117  [ASSET_TRACKER0]  149.86,5.08 0 top
U$118  [UPDATE_TOOL0]  149.84,3.75 0 top
U$119  [MICROMOD_LOGO_.35]  152.15,15.91 0 bottom
U$120  [#GND#2]  166.98,18.41 0 top
U$121  [#3V3#3]  166.98,14.77 0 top
U$122  [#CTS#0]  166.64,12.45 90 bottom
U$123  [#DSR#0]  169.18,12.39 90 bottom
U$124  [#RTS#0]  179.27,12.45 90 bottom
U$125  [#DCD#0]  174.26,12.45 90 bottom
U$126  [#TX#0]  184.42,12.26 90 bottom
U$127  [#RX#0]  181.88,12.26 90 bottom
U$128  [#DTR#0]  176.8,12.51 90 bottom
U$129  [#RI#0]  171.72,11.87 90 bottom
U$130  [#3V3#3]  166.99,14.76 0 bottom
U$131  [#GND#2]  166.98,18.41 0 bottom
U$132  [#PWR#0]  183.34,17.53 270 top
U$133  [MICROMOD_MI_LOGO_.35]  166.9,12.52 0 top
U$134  [ASSET_TRACKER0]  172.36,5.08 0 top
U$135  [UPDATE_TOOL0]  172.35,3.75 0 top
U$136  [MICROMOD_LOGO_.35]  174.66,15.91 0 bottom
U$137  [#GND#2]  26.29,51.44 180 top
U$138  [#3V3#3]  26.29,55.08 180 top
U$139  [#CTS#0]  26.63,57.4 270 bottom
U$140  [#DSR#0]  24.09,57.46 270 bottom
U$141  [#RTS#0]  14,57.4 270 bottom
U$142  [#DCD#0]  19.01,57.4 270 bottom
U$143  [#TX#0]  8.85,57.59 270 bottom
U$144  [#RX#0]  11.39,57.59 270 bottom
U$145  [#DTR#0]  16.47,57.34 270 bottom
U$146  [#RI#0]  21.55,57.98 270 bottom
U$147  [#3V3#3]  26.28,55.09 180 bottom
U$148  [#GND#2]  26.29,51.44 180 bottom
U$149  [#PWR#0]  9.93,52.32 90 top
U$150  [MICROMOD_MI_LOGO_.35]  26.37,57.33 180 top
U$151  [ASSET_TRACKER0]  20.91,64.77 180 top
U$152  [UPDATE_TOOL0]  20.92,66.1 180 top
U$153  [MICROMOD_LOGO_.35]  18.61,53.94 180 bottom
U$154  [#GND#2]  48.8,51.44 180 top
U$155  [#3V3#3]  48.8,55.08 180 top
U$156  [#CTS#0]  49.14,57.4 270 bottom
U$157  [#DSR#0]  46.6,57.46 270 bottom
U$158  [#RTS#0]  36.51,57.4 270 bottom
U$159  [#DCD#0]  41.52,57.4 270 bottom
U$160  [#TX#0]  31.36,57.59 270 bottom
U$161  [#RX#0]  33.9,57.59 270 bottom
U$162  [#DTR#0]  38.98,57.34 270 bottom
U$163  [#RI#0]  44.06,57.98 270 bottom
U$164  [#3V3#3]  48.79,55.09 180 bottom
U$165  [#GND#2]  48.8,51.44 180 bottom
U$166  [#PWR#0]  32.44,52.32 90 top
U$167  [MICROMOD_MI_LOGO_.35]  48.88,57.33 180 top
U$168  [ASSET_TRACKER0]  43.42,64.77 180 top
U$169  [UPDATE_TOOL0]  43.43,66.1 180 top
U$170  [MICROMOD_LOGO_.35]  41.12,53.94 180 bottom
U$171  [#GND#2]  71.31,51.44 180 top
U$172  [#3V3#3]  71.31,55.08 180 top
U$173  [#CTS#0]  71.65,57.4 270 bottom
U$174  [#DSR#0]  69.11,57.46 270 bottom
U$175  [#RTS#0]  59.01,57.4 270 bottom
U$176  [#DCD#0]  64.03,57.4 270 bottom
U$177  [#TX#0]  53.87,57.59 270 bottom
U$178  [#RX#0]  56.41,57.59 270 bottom
U$179  [#DTR#0]  61.49,57.34 270 bottom
U$180  [#RI#0]  66.57,57.98 270 bottom
U$181  [#3V3#3]  71.3,55.09 180 bottom
U$182  [#GND#2]  71.31,51.44 180 bottom
U$183  [#PWR#0]  54.95,52.32 90 top
U$184  [MICROMOD_MI_LOGO_.35]  71.38,57.33 180 top
U$185  [ASSET_TRACKER0]  65.92,64.77 180 top
U$186  [UPDATE_TOOL0]  65.94,66.1 180 top
U$187  [MICROMOD_LOGO_.35]  63.63,53.94 180 bottom
U$188  [#GND#2]  93.82,51.44 180 top
U$189  [#3V3#3]  93.82,55.08 180 top
U$190  [#CTS#0]  94.16,57.4 270 bottom
U$191  [#DSR#0]  91.62,57.46 270 bottom
U$192  [#RTS#0]  81.52,57.4 270 bottom
U$193  [#DCD#0]  86.54,57.4 270 bottom
U$194  [#TX#0]  76.38,57.59 270 bottom
U$195  [#RX#0]  78.92,57.59 270 bottom
U$196  [#DTR#0]  84,57.34 270 bottom
U$197  [#RI#0]  89.08,57.98 270 bottom
U$198  [#3V3#3]  93.81,55.09 180 bottom
U$199  [#GND#2]  93.82,51.44 180 bottom
U$200  [#PWR#0]  77.46,52.32 90 top
U$201  [MICROMOD_MI_LOGO_.35]  93.89,57.33 180 top
U$202  [ASSET_TRACKER0]  88.43,64.77 180 top
U$203  [UPDATE_TOOL0]  88.45,66.1 180 top
U$204  [MICROMOD_LOGO_.35]  86.14,53.94 180 bottom
U$205  [#GND#2]  116.33,51.44 180 top
U$206  [#3V3#3]  116.32,55.08 180 top
U$207  [#CTS#0]  116.67,57.4 270 bottom
U$208  [#DSR#0]  114.13,57.46 270 bottom
U$209  [#RTS#0]  104.03,57.4 270 bottom
U$210  [#DCD#0]  109.05,57.4 270 bottom
U$211  [#TX#0]  98.89,57.59 270 bottom
U$212  [#RX#0]  101.43,57.59 270 bottom
U$213  [#DTR#0]  106.51,57.34 270 bottom
U$214  [#RI#0]  111.59,57.98 270 bottom
U$215  [#3V3#3]  116.31,55.09 180 bottom
U$216  [#GND#2]  116.33,51.44 180 bottom
U$217  [#PWR#0]  99.97,52.32 90 top
U$218  [MICROMOD_MI_LOGO_.35]  116.4,57.33 180 top
U$219  [ASSET_TRACKER0]  110.94,64.77 180 top
U$220  [UPDATE_TOOL0]  110.95,66.1 180 top
U$221  [MICROMOD_LOGO_.35]  108.65,53.94 180 bottom
U$222  [#GND#2]  138.84,51.44 180 top
U$223  [#3V3#3]  138.83,55.08 180 top
U$224  [#CTS#0]  139.18,57.4 270 bottom
U$225  [#DSR#0]  136.64,57.46 270 bottom
U$226  [#RTS#0]  126.54,57.4 270 bottom
U$227  [#DCD#0]  131.56,57.4 270 bottom
U$228  [#TX#0]  121.4,57.59 270 bottom
U$229  [#RX#0]  123.94,57.59 270 bottom
U$230  [#DTR#0]  129.02,57.34 270 bottom
U$231  [#RI#0]  134.1,57.98 270 bottom
U$232  [#3V3#3]  138.82,55.09 180 bottom
U$233  [#GND#2]  138.84,51.44 180 bottom
U$234  [#PWR#0]  122.48,52.32 90 top
U$235  [MICROMOD_MI_LOGO_.35]  138.91,57.33 180 top
U$236  [ASSET_TRACKER0]  133.45,64.77 180 top
U$237  [UPDATE_TOOL0]  133.46,66.1 180 top
U$238  [MICROMOD_LOGO_.35]  131.15,53.94 180 bottom
U$239  [#GND#2]  161.34,51.44 180 top
U$240  [#3V3#3]  161.34,55.08 180 top
U$241  [#CTS#0]  161.68,57.4 270 bottom
U$242  [#DSR#0]  159.14,57.46 270 bottom
U$243  [#RTS#0]  149.05,57.4 270 bottom
U$244  [#DCD#0]  154.06,57.4 270 bottom
U$245  [#TX#0]  143.9,57.59 270 bottom
U$246  [#RX#0]  146.44,57.59 270 bottom
U$247  [#DTR#0]  151.52,57.34 270 bottom
U$248  [#RI#0]  156.6,57.98 270 bottom
U$249  [#3V3#3]  161.33,55.09 180 bottom
U$250  [#GND#2]  161.34,51.44 180 bottom
U$251  [#PWR#0]  144.98,52.32 90 top
U$252  [MICROMOD_MI_LOGO_.35]  161.42,57.33 180 top
U$253  [ASSET_TRACKER0]  155.96,64.77 180 top
U$254  [UPDATE_TOOL0]  155.97,66.1 180 top
U$255  [MICROMOD_LOGO_.35]  153.66,53.94 180 bottom
U$256  [#GND#2]  183.85,51.44 180 top
U$257  [#3V3#3]  183.85,55.08 180 top
U$258  [#CTS#0]  184.19,57.4 270 bottom
U$259  [#DSR#0]  181.65,57.46 270 bottom
U$260  [#RTS#0]  171.55,57.4 270 bottom
U$261  [#DCD#0]  176.57,57.4 270 bottom
U$262  [#TX#0]  166.41,57.59 270 bottom
U$263  [#RX#0]  168.95,57.59 270 bottom
U$264  [#DTR#0]  174.03,57.34 270 bottom
U$265  [#RI#0]  179.11,57.98 270 bottom
U$266  [#3V3#3]  183.84,55.09 180 bottom
U$267  [#GND#2]  183.85,51.44 180 bottom
U$268  [#PWR#0]  167.49,52.32 90 top
U$269  [MICROMOD_MI_LOGO_.35]  183.92,57.33 180 top
U$270  [ASSET_TRACKER0]  178.46,64.77 180 top
U$271  [UPDATE_TOOL0]  178.48,66.1 180 top
U$272  [MICROMOD_LOGO_.35]  176.17,53.94 180 bottom

## Library data of the parts
C1-C16 = SparkFun-Capacitors; PROD_ID: CAP-08604
CTS CTS1-CTS15 DCD DCD1-DCD15 DSR DSR1-DSR15 DTR DTR1-DTR15 RI RI1-RI15 RTS RTS1-RTS15 RXI RXI1-RXI15 TXO TXO1-TXO15 = SparkFun-Jumpers
D1-D16 = SparkFun-LED; PROD_ID: DIO-08575
E$1-E$4 JP1-JP64 LOGO1-LOGO32 = SparkFun-Aesthetics
E$5 E$6 = SparkFun-Retired
J1-J4 J7 J8 J10 J11 J13 J14 J16 J17 J19 J20 J22 J23 J25 J26 J28 J29 J31 J32 J34 J35 J37 J38 J40 J41 J43 J44 J46 J47 = SparkFun-Connectors
J5 J6 J9 J12 J15 J18 J21 J24 J27 J30 J33 J36 J39 J42 J45 J48 U$9 U$12 U$31 U$34 U$48 U$51 U$65 U$68 U$82 U$85 U$99 U$102 U$116 U$119 U$133 U$136 U$150 U$153 U$167 U$170 U$184 U$187 U$201 U$204 U$218 U$221 U$235 U$238 U$252 U$255 U$269 U$272 = SparkFun-MicroMod
R1-R16 = SparkFun-Resistors; PROD_ID: RES-07856
U1-U16 = SparkFun-IC-Comms; PROD_ID: IC-14038
U$1-U$8 U$10 U$11 U$13-U$30 U$32 U$33 U$35-U$47 U$49 U$50 U$52-U$64 U$66 U$67 U$69-U$81 U$83 U$84 U$86-U$98 U$100 U$101 U$103-U$115 U$117 U$118 U$120-U$132 U$134 U$135 U$137-U$149 U$151 U$152 U$154-U$166 U$168 U$169 U$171-U$183 U$185 U$186 U$188-U$200 U$202 U$203 U$205-U$217 U$219 U$220 U$222-U$234 U$236 U$237 U$239-U$251 U$253 U$254 U$256-U$268 U$270 U$271 = output

## Nets
3.3V [power]: C3.1 J2.1 J5.2 J5.74 R1.2 U2.4 U2.16
3.3V1 [power]: C1.1 J3.1 J6.2 J6.74 R2.2 U1.4 U1.16
3.3V2 [power]: C2.1 J7.1 J9.2 J9.74 R3.2 U3.4 U3.16
3.3V3 [power]: C4.1 J10.1 J12.2 J12.74 R4.2 U4.4 U4.16
3.3V4 [power]: C5.1 J13.1 J15.2 J15.74 R5.2 U5.4 U5.16
3.3V5 [power]: C6.1 J16.1 J18.2 J18.74 R6.2 U6.4 U6.16
3.3V6 [power]: C7.1 J19.1 J21.2 J21.74 R7.2 U7.4 U7.16
3.3V7 [power]: C8.1 J22.1 J24.2 J24.74 R8.2 U8.4 U8.16
3.3V8 [power]: C9.1 J25.1 J27.2 J27.74 R9.2 U9.4 U9.16
3.3V9 [power]: C10.1 J28.1 J30.2 J30.74 R10.2 U10.4 U10.16
3.3V10 [power]: C11.1 J31.1 J33.2 J33.74 R11.2 U11.4 U11.16
3.3V11 [power]: C12.1 J34.1 J36.2 J36.74 R12.2 U12.4 U12.16
3.3V12 [power]: C13.1 J37.1 J39.2 J39.74 R13.2 U13.4 U13.16
3.3V13 [power]: C14.1 J40.1 J42.2 J42.74 R14.2 U14.4 U14.16
3.3V14 [power]: C15.1 J43.1 J45.2 J45.74 R15.2 U15.4 U15.16
3.3V15 [power]: C16.1 J46.1 J48.2 J48.74 R16.2 U16.4 U16.16
!CTS!_I: CTS.1 CTS.3 U2.9
!CTS!_I1: CTS1.1 CTS1.3 U1.9
!CTS!_I2: CTS2.1 CTS2.3 U3.9
!CTS!_I3: CTS3.1 CTS3.3 U4.9
!CTS!_I4: CTS4.1 CTS4.3 U5.9
!CTS!_I5: CTS5.1 CTS5.3 U6.9
!CTS!_I6: CTS6.1 CTS6.3 U7.9
!CTS!_I7: CTS7.1 CTS7.3 U8.9
!CTS!_I8: CTS8.1 CTS8.3 U9.9
!CTS!_I9: CTS9.1 CTS9.3 U10.9
!CTS!_I10: CTS10.1 CTS10.3 U11.9
!CTS!_I11: CTS11.1 CTS11.3 U12.9
!CTS!_I12: CTS12.1 CTS12.3 U13.9
!CTS!_I13: CTS13.1 CTS13.3 U14.9
!CTS!_I14: CTS14.1 CTS14.3 U15.9
!CTS!_I15: CTS15.1 CTS15.3 U16.9
!DCD!_I: DCD.1 DCD.3 U2.12
!DCD!_I1: DCD1.1 DCD1.3 U1.12
!DCD!_I2: DCD2.1 DCD2.3 U3.12
!DCD!_I3: DCD3.1 DCD3.3 U4.12
!DCD!_I4: DCD4.1 DCD4.3 U5.12
!DCD!_I5: DCD5.1 DCD5.3 U6.12
!DCD!_I6: DCD6.1 DCD6.3 U7.12
!DCD!_I7: DCD7.1 DCD7.3 U8.12
!DCD!_I8: DCD8.1 DCD8.3 U9.12
!DCD!_I9: DCD9.1 DCD9.3 U10.12
!DCD!_I10: DCD10.1 DCD10.3 U11.12
!DCD!_I11: DCD11.1 DCD11.3 U12.12
!DCD!_I12: DCD12.1 DCD12.3 U13.12
!DCD!_I13: DCD13.1 DCD13.3 U14.12
!DCD!_I14: DCD14.1 DCD14.3 U15.12
!DCD!_I15: DCD15.1 DCD15.3 U16.12
!DSR!_I: DSR.1 DSR.3 U2.10
!DSR!_I1: DSR1.1 DSR1.3 U1.10
!DSR!_I2: DSR2.1 DSR2.3 U3.10
!DSR!_I3: DSR3.1 DSR3.3 U4.10
!DSR!_I4: DSR4.1 DSR4.3 U5.10
!DSR!_I5: DSR5.1 DSR5.3 U6.10
!DSR!_I6: DSR6.1 DSR6.3 U7.10
!DSR!_I7: DSR7.1 DSR7.3 U8.10
!DSR!_I8: DSR8.1 DSR8.3 U9.10
!DSR!_I9: DSR9.1 DSR9.3 U10.10
!DSR!_I10: DSR10.1 DSR10.3 U11.10
!DSR!_I11: DSR11.1 DSR11.3 U12.10
!DSR!_I12: DSR12.1 DSR12.3 U13.10
!DSR!_I13: DSR13.1 DSR13.3 U14.10
!DSR!_I14: DSR14.1 DSR14.3 U15.10
!DSR!_I15: DSR15.1 DSR15.3 U16.10
!DTR!_O: DTR.1 DTR.3 U2.13
!DTR!_O1: DTR1.1 DTR1.3 U1.13
!DTR!_O2: DTR2.1 DTR2.3 U3.13
!DTR!_O3: DTR3.1 DTR3.3 U4.13
!DTR!_O4: DTR4.1 DTR4.3 U5.13
!DTR!_O5: DTR5.1 DTR5.3 U6.13
!DTR!_O6: DTR6.1 DTR6.3 U7.13
!DTR!_O7: DTR7.1 DTR7.3 U8.13
!DTR!_O8: DTR8.1 DTR8.3 U9.13
!DTR!_O9: DTR9.1 DTR9.3 U10.13
!DTR!_O10: DTR10.1 DTR10.3 U11.13
!DTR!_O11: DTR11.1 DTR11.3 U12.13
!DTR!_O12: DTR12.1 DTR12.3 U13.13
!DTR!_O13: DTR13.1 DTR13.3 U14.13
!DTR!_O14: DTR14.1 DTR14.3 U15.13
!DTR!_O15: DTR15.1 DTR15.3 U16.13
!RI!_I: RI.1 RI.3 U2.11
!RI!_I1: RI1.1 RI1.3 U1.11
!RI!_I2: RI2.1 RI2.3 U3.11
!RI!_I3: RI3.1 RI3.3 U4.11
!RI!_I4: RI4.1 RI4.3 U5.11
!RI!_I5: RI5.1 RI5.3 U6.11
!RI!_I6: RI6.1 RI6.3 U7.11
!RI!_I7: RI7.1 RI7.3 U8.11
!RI!_I8: RI8.1 RI8.3 U9.11
!RI!_I9: RI9.1 RI9.3 U10.11
!RI!_I10: RI10.1 RI10.3 U11.11
!RI!_I11: RI11.1 RI11.3 U12.11
!RI!_I12: RI12.1 RI12.3 U13.11
!RI!_I13: RI13.1 RI13.3 U14.11
!RI!_I14: RI14.1 RI14.3 U15.11
!RI!_I15: RI15.1 RI15.3 U16.11
!RTS!_O: RTS.1 RTS.3 U2.14
!RTS!_O1: RTS1.1 RTS1.3 U1.14
!RTS!_O2: RTS2.1 RTS2.3 U3.14
!RTS!_O3: RTS3.1 RTS3.3 U4.14
!RTS!_O4: RTS4.1 RTS4.3 U5.14
!RTS!_O5: RTS5.1 RTS5.3 U6.14
!RTS!_O6: RTS6.1 RTS6.3 U7.14
!RTS!_O7: RTS7.1 RTS7.3 U8.14
!RTS!_O8: RTS8.1 RTS8.3 U9.14
!RTS!_O9: RTS9.1 RTS9.3 U10.14
!RTS!_O10: RTS10.1 RTS10.3 U11.14
!RTS!_O11: RTS11.1 RTS11.3 U12.14
!RTS!_O12: RTS12.1 RTS12.3 U13.14
!RTS!_O13: RTS13.1 RTS13.3 U14.14
!RTS!_O14: RTS14.1 RTS14.3 U15.14
!RTS!_O15: RTS15.1 RTS15.3 U16.14
GND [power]: C3.2 D1.C J1.1 J5.1 J5.7 J5.33 J5.36 J5.39 J5.45 J5.75 J5.GND1 J5.GND2 J5.GND3 U2.1
GND1 [power]: C1.2 D2.C J4.1 J6.1 J6.7 J6.33 J6.36 J6.39 J6.45 J6.75 J6.GND1 J6.GND2 J6.GND3 U1.1
GND2 [power]: C2.2 D3.C J8.1 J9.1 J9.7 J9.33 J9.36 J9.39 J9.45 J9.75 J9.GND1 J9.GND2 J9.GND3 U3.1
GND3 [power]: C4.2 D4.C J11.1 J12.1 J12.7 J12.33 J12.36 J12.39 J12.45 J12.75 J12.GND1 J12.GND2 J12.GND3 U4.1
GND4 [power]: C5.2 D5.C J14.1 J15.1 J15.7 J15.33 J15.36 J15.39 J15.45 J15.75 J15.GND1 J15.GND2 J15.GND3 U5.1
GND5 [power]: C6.2 D6.C J17.1 J18.1 J18.7 J18.33 J18.36 J18.39 J18.45 J18.75 J18.GND1 J18.GND2 J18.GND3 U6.1
GND6 [power]: C7.2 D7.C J20.1 J21.1 J21.7 J21.33 J21.36 J21.39 J21.45 J21.75 J21.GND1 J21.GND2 J21.GND3 U7.1
GND7 [power]: C8.2 D8.C J23.1 J24.1 J24.7 J24.33 J24.36 J24.39 J24.45 J24.75 J24.GND1 J24.GND2 J24.GND3 U8.1
GND8 [power]: C9.2 D9.C J26.1 J27.1 J27.7 J27.33 J27.36 J27.39 J27.45 J27.75 J27.GND1 J27.GND2 J27.GND3 U9.1
GND9 [power]: C10.2 D10.C J29.1 J30.1 J30.7 J30.33 J30.36 J30.39 J30.45 J30.75 J30.GND1 J30.GND2 J30.GND3 U10.1
GND10 [power]: C11.2 D11.C J32.1 J33.1 J33.7 J33.33 J33.36 J33.39 J33.45 J33.75 J33.GND1 J33.GND2 J33.GND3 U11.1
GND11 [power]: C12.2 D12.C J35.1 J36.1 J36.7 J36.33 J36.36 J36.39 J36.45 J36.75 J36.GND1 J36.GND2 J36.GND3 U12.1
GND12 [power]: C13.2 D13.C J38.1 J39.1 J39.7 J39.33 J39.36 J39.39 J39.45 J39.75 J39.GND1 J39.GND2 J39.GND3 U13.1
GND13 [power]: C14.2 D14.C J41.1 J42.1 J42.7 J42.33 J42.36 J42.39 J42.45 J42.75 J42.GND1 J42.GND2 J42.GND3 U14.1
GND14 [power]: C15.2 D15.C J44.1 J45.1 J45.7 J45.33 J45.36 J45.39 J45.45 J45.75 J45.GND1 J45.GND2 J45.GND3 U15.1
GND15 [power]: C16.2 D16.C J47.1 J48.1 J48.7 J48.33 J48.36 J48.39 J48.45 J48.75 J48.GND1 J48.GND2 J48.GND3 U16.1
N$1: D2.A R2.1
N$2: D3.A R3.1
N$3: D1.A R1.1
N$4: D4.A R4.1
N$5: D5.A R5.1
N$6: D6.A R6.1
N$7: D7.A R7.1
N$8: D8.A R8.1
N$9: D9.A R9.1
N$10: D10.A R10.1
N$11: D11.A R11.1
N$12: D12.A R12.1
N$13: D13.A R13.1
N$14: D14.A R14.1
N$15: D15.A R15.1
N$16: D16.A R16.1
RXI: RXI.1 RXI.3 U2.3
RXI1: RXI1.1 RXI1.3 U1.3
RXI2: RXI2.1 RXI2.3 U3.3
RXI3: RXI3.1 RXI3.3 U4.3
RXI4: RXI4.1 RXI4.3 U5.3
RXI5: RXI5.1 RXI5.3 U6.3
RXI6: RXI6.1 RXI6.3 U7.3
RXI7: RXI7.1 RXI7.3 U8.3
RXI8: RXI8.1 RXI8.3 U9.3
RXI9: RXI9.1 RXI9.3 U10.3
RXI10: RXI10.1 RXI10.3 U11.3
RXI11: RXI11.1 RXI11.3 U12.3
RXI12: RXI12.1 RXI12.3 U13.3
RXI13: RXI13.1 RXI13.3 U14.3
RXI14: RXI14.1 RXI14.3 U15.3
RXI15: RXI15.1 RXI15.3 U16.3
SARA_CTS_O: CTS.2 CTS.4 J5.15
SARA_CTS_O1: CTS1.2 CTS1.4 J6.15
SARA_CTS_O2: CTS2.2 CTS2.4 J9.15
SARA_CTS_O3: CTS3.2 CTS3.4 J12.15
SARA_CTS_O4: CTS4.2 CTS4.4 J15.15
SARA_CTS_O5: CTS5.2 CTS5.4 J18.15
SARA_CTS_O6: CTS6.2 CTS6.4 J21.15
SARA_CTS_O7: CTS7.2 CTS7.4 J24.15
SARA_CTS_O8: CTS8.2 CTS8.4 J27.15
SARA_CTS_O9: CTS9.2 CTS9.4 J30.15
SARA_CTS_O10: CTS10.2 CTS10.4 J33.15
SARA_CTS_O11: CTS11.2 CTS11.4 J36.15
SARA_CTS_O12: CTS12.2 CTS12.4 J39.15
SARA_CTS_O13: CTS13.2 CTS13.4 J42.15
SARA_CTS_O14: CTS14.2 CTS14.4 J45.15
SARA_CTS_O15: CTS15.2 CTS15.4 J48.15
SARA_DCD_O: DCD.2 DCD.4 J5.20
SARA_DCD_O1: DCD1.2 DCD1.4 J6.20
SARA_DCD_O2: DCD2.2 DCD2.4 J9.20
SARA_DCD_O3: DCD3.2 DCD3.4 J12.20
SARA_DCD_O4: DCD4.2 DCD4.4 J15.20
SARA_DCD_O5: DCD5.2 DCD5.4 J18.20
SARA_DCD_O6: DCD6.2 DCD6.4 J21.20
SARA_DCD_O7: DCD7.2 DCD7.4 J24.20
SARA_DCD_O8: DCD8.2 DCD8.4 J27.20
SARA_DCD_O9: DCD9.2 DCD9.4 J30.20
SARA_DCD_O10: DCD10.2 DCD10.4 J33.20
SARA_DCD_O11: DCD11.2 DCD11.4 J36.20
SARA_DCD_O12: DCD12.2 DCD12.4 J39.20
SARA_DCD_O13: DCD13.2 DCD13.4 J42.20
SARA_DCD_O14: DCD14.2 DCD14.4 J45.20
SARA_DCD_O15: DCD15.2 DCD15.4 J48.20
SARA_DSR_O: DSR.2 DSR.4 J5.69
SARA_DSR_O1: DSR1.2 DSR1.4 J6.69
SARA_DSR_O2: DSR2.2 DSR2.4 J9.69
SARA_DSR_O3: DSR3.2 DSR3.4 J12.69
SARA_DSR_O4: DSR4.2 DSR4.4 J15.69
SARA_DSR_O5: DSR5.2 DSR5.4 J18.69
SARA_DSR_O6: DSR6.2 DSR6.4 J21.69
SARA_DSR_O7: DSR7.2 DSR7.4 J24.69
SARA_DSR_O8: DSR8.2 DSR8.4 J27.69
SARA_DSR_O9: DSR9.2 DSR9.4 J30.69
SARA_DSR_O10: DSR10.2 DSR10.4 J33.69
SARA_DSR_O11: DSR11.2 DSR11.4 J36.69
SARA_DSR_O12: DSR12.2 DSR12.4 J39.69
SARA_DSR_O13: DSR13.2 DSR13.4 J42.69
SARA_DSR_O14: DSR14.2 DSR14.4 J45.69
SARA_DSR_O15: DSR15.2 DSR15.4 J48.69
SARA_DTR_I: DTR.2 DTR.4 J5.22
SARA_DTR_I1: DTR1.2 DTR1.4 J6.22
SARA_DTR_I2: DTR2.2 DTR2.4 J9.22
SARA_DTR_I3: DTR3.2 DTR3.4 J12.22
SARA_DTR_I4: DTR4.2 DTR4.4 J15.22
SARA_DTR_I5: DTR5.2 DTR5.4 J18.22
SARA_DTR_I6: DTR6.2 DTR6.4 J21.22
SARA_DTR_I7: DTR7.2 DTR7.4 J24.22
SARA_DTR_I8: DTR8.2 DTR8.4 J27.22
SARA_DTR_I9: DTR9.2 DTR9.4 J30.22
SARA_DTR_I10: DTR10.2 DTR10.4 J33.22
SARA_DTR_I11: DTR11.2 DTR11.4 J36.22
SARA_DTR_I12: DTR12.2 DTR12.4 J39.22
SARA_DTR_I13: DTR13.2 DTR13.4 J42.22
SARA_DTR_I14: DTR14.2 DTR14.4 J45.22
SARA_DTR_I15: DTR15.2 DTR15.4 J48.22
SARA_RI_O: J5.48 RI.2 RI.4
SARA_RI_O1: J6.48 RI1.2 RI1.4
SARA_RI_O2: J9.48 RI2.2 RI2.4
SARA_RI_O3: J12.48 RI3.2 RI3.4
SARA_RI_O4: J15.48 RI4.2 RI4.4
SARA_RI_O5: J18.48 RI5.2 RI5.4
SARA_RI_O6: J21.48 RI6.2 RI6.4
SARA_RI_O7: J24.48 RI7.2 RI7.4
SARA_RI_O8: J27.48 RI8.2 RI8.4
SARA_RI_O9: J30.48 RI9.2 RI9.4
SARA_RI_O10: J33.48 RI10.2 RI10.4
SARA_RI_O11: J36.48 RI11.2 RI11.4
SARA_RI_O12: J39.48 RI12.2 RI12.4
SARA_RI_O13: J42.48 RI13.2 RI13.4
SARA_RI_O14: J45.48 RI14.2 RI14.4
SARA_RI_O15: J48.48 RI15.2 RI15.4
SARA_RTS_I: J5.13 RTS.2 RTS.4
SARA_RTS_I1: J6.13 RTS1.2 RTS1.4
SARA_RTS_I2: J9.13 RTS2.2 RTS2.4
SARA_RTS_I3: J12.13 RTS3.2 RTS3.4
SARA_RTS_I4: J15.13 RTS4.2 RTS4.4
SARA_RTS_I5: J18.13 RTS5.2 RTS5.4
SARA_RTS_I6: J21.13 RTS6.2 RTS6.4
SARA_RTS_I7: J24.13 RTS7.2 RTS7.4
SARA_RTS_I8: J27.13 RTS8.2 RTS8.4
SARA_RTS_I9: J30.13 RTS9.2 RTS9.4
SARA_RTS_I10: J33.13 RTS10.2 RTS10.4
SARA_RTS_I11: J36.13 RTS11.2 RTS11.4
SARA_RTS_I12: J39.13 RTS12.2 RTS12.4
SARA_RTS_I13: J42.13 RTS13.2 RTS13.4
SARA_RTS_I14: J45.13 RTS14.2 RTS14.4
SARA_RTS_I15: J48.13 RTS15.2 RTS15.4
SARA_RXD_O: J5.19 RXI.2 RXI.4
SARA_RXD_O1: J6.19 RXI1.2 RXI1.4
SARA_RXD_O2: J9.19 RXI2.2 RXI2.4
SARA_RXD_O3: J12.19 RXI3.2 RXI3.4
SARA_RXD_O4: J15.19 RXI4.2 RXI4.4
SARA_RXD_O5: J18.19 RXI5.2 RXI5.4
SARA_RXD_O6: J21.19 RXI6.2 RXI6.4
SARA_RXD_O7: J24.19 RXI7.2 RXI7.4
SARA_RXD_O8: J27.19 RXI8.2 RXI8.4
SARA_RXD_O9: J30.19 RXI9.2 RXI9.4
SARA_RXD_O10: J33.19 RXI10.2 RXI10.4
SARA_RXD_O11: J36.19 RXI11.2 RXI11.4
SARA_RXD_O12: J39.19 RXI12.2 RXI12.4
SARA_RXD_O13: J42.19 RXI13.2 RXI13.4
SARA_RXD_O14: J45.19 RXI14.2 RXI14.4
SARA_RXD_O15: J48.19 RXI15.2 RXI15.4
SARA_TXD_I: J5.17 TXO.2 TXO.4
SARA_TXD_I1: J6.17 TXO1.2 TXO1.4
SARA_TXD_I2: J9.17 TXO2.2 TXO2.4
SARA_TXD_I3: J12.17 TXO3.2 TXO3.4
SARA_TXD_I4: J15.17 TXO4.2 TXO4.4
SARA_TXD_I5: J18.17 TXO5.2 TXO5.4
SARA_TXD_I6: J21.17 TXO6.2 TXO6.4
SARA_TXD_I7: J24.17 TXO7.2 TXO7.4
SARA_TXD_I8: J27.17 TXO8.2 TXO8.4
SARA_TXD_I9: J30.17 TXO9.2 TXO9.4
SARA_TXD_I10: J33.17 TXO10.2 TXO10.4
SARA_TXD_I11: J36.17 TXO11.2 TXO11.4
SARA_TXD_I12: J39.17 TXO12.2 TXO12.4
SARA_TXD_I13: J42.17 TXO13.2 TXO13.4
SARA_TXD_I14: J45.17 TXO14.2 TXO14.4
SARA_TXD_I15: J48.17 TXO15.2 TXO15.4
TXO: TXO.1 TXO.3 U2.2
TXO1: TXO1.1 TXO1.3 U1.2
TXO2: TXO2.1 TXO2.3 U3.2
TXO3: TXO3.1 TXO3.3 U4.2
TXO4: TXO4.1 TXO4.3 U5.2
TXO5: TXO5.1 TXO5.3 U6.2
TXO6: TXO6.1 TXO6.3 U7.2
TXO7: TXO7.1 TXO7.3 U8.2
TXO8: TXO8.1 TXO8.3 U9.2
TXO9: TXO9.1 TXO9.3 U10.2
TXO10: TXO10.1 TXO10.3 U11.2
TXO11: TXO11.1 TXO11.3 U12.2
TXO12: TXO12.1 TXO12.3 U13.2
TXO13: TXO13.1 TXO13.3 U14.2
TXO14: TXO14.1 TXO14.3 U15.2
TXO15: TXO15.1 TXO15.3 U16.2
USB_D+: J5.3 U2.5
USB_D+1: J6.3 U1.5
USB_D+2: J9.3 U3.5
USB_D+3: J12.3 U4.5
USB_D+4: J15.3 U5.5
USB_D+5: J18.3 U6.5
USB_D+6: J21.3 U7.5
USB_D+7: J24.3 U8.5
USB_D+8: J27.3 U9.5
USB_D+9: J30.3 U10.5
USB_D+10: J33.3 U11.5
USB_D+11: J36.3 U12.5
USB_D+12: J39.3 U13.5
USB_D+13: J42.3 U14.5
USB_D+14: J45.3 U15.5
USB_D+15: J48.3 U16.5
USB_D-: J5.5 U2.6
USB_D-1: J6.5 U1.6
USB_D-2: J9.5 U3.6
USB_D-3: J12.5 U4.6
USB_D-4: J15.5 U5.6
USB_D-5: J18.5 U6.6
USB_D-6: J21.5 U7.6
USB_D-7: J24.5 U8.6
USB_D-8: J27.5 U9.6
USB_D-9: J30.5 U10.6
USB_D-10: J33.5 U11.6
USB_D-11: J36.5 U12.6
USB_D-12: J39.5 U13.6
USB_D-13: J42.5 U14.6
USB_D-14: J45.5 U15.6
USB_D-15: J48.5 U16.6

## Tracks (layer width: path | path; a pad name or v marks a point on that pad's centre or on a via)
3.3V  (via drill 0.3)
  Top 0.254: v27.3,11.43 27.3,12.6 R1.2 27.31,12.7 25.27,12.7 24.77,12.2 U2.16 22.29,12.21 22.29,13.4 21.97,13.72 18.48,13.72 | 18.48,13.72 v17.27,13.72 | 18.48,13.72 18.49,13.73 U2.4 18.49,19.93 18.1,20.32 C3.1
  Bottom 0.254: J5.2 26.88,3.64 28.32,5.08 28.32,10.41 v27.3,11.43 | J5.74 8.88,3.44 7.37,4.95 7.37,11.68 9.4,13.72 | 9.4,13.72 v17.27,13.72 | J2.1 9.4,13.72
3.3V1  (via drill 0.3)
  Top 0.254: v49.81,11.43 49.81,12.6 R2.2 49.81,12.7 47.78,12.7 47.28,12.2 U1.16 44.79,12.21 44.79,13.4 44.48,13.72 40.98,13.72 | 40.98,13.72 v39.78,13.72 | 40.98,13.72 41,13.73 U1.4 41,19.93 40.61,20.32 C1.1
  Bottom 0.254: J6.2 49.38,3.64 50.83,5.08 50.83,10.41 v49.81,11.43 | J6.74 31.39,3.44 29.87,4.95 29.87,11.68 31.91,13.72 | 31.91,13.72 v39.78,13.72 | J3.1 31.91,13.72
3.3V2  (via drill 0.3)
  Top 0.254: v72.32,11.43 72.32,12.6 R3.2 72.32,12.7 70.29,12.7 69.79,12.2 U3.16 67.31,12.21 67.31,13.4 66.99,13.72 63.49,13.72 | 63.49,13.72 v62.29,13.72 | 63.49,13.72 63.51,13.73 U3.4 63.51,19.93 63.12,20.32 C2.1
  Bottom 0.254: J9.2 71.89,3.64 73.34,5.08 73.34,10.41 v72.32,11.43 | J9.74 53.89,3.44 52.38,4.95 52.38,11.68 54.41,13.72 | 54.41,13.72 v62.29,13.72 | J7.1 54.41,13.72
3.3V3  (via drill 0.3)
  Top 0.254: v94.83,11.43 94.83,12.6 R4.2 94.83,12.7 92.8,12.7 92.3,12.2 U4.16 89.81,12.21 89.81,13.4 89.49,13.72 86,13.72 | 86,13.72 v84.8,13.72 | 86,13.72 86.02,13.73 U4.4 86.02,19.93 85.62,20.32 C4.1
  Bottom 0.254: J12.2 94.4,3.64 95.84,5.08 95.84,10.41 v94.83,11.43 | J12.74 76.4,3.44 74.89,4.95 74.89,11.68 76.92,13.72 | 76.92,13.72 v84.8,13.72 | J10.1 76.92,13.72
3.3V4  (via drill 0.3)
  Top 0.254: v117.34,11.43 117.34,12.6 R5.2 117.34,12.7 115.31,12.7 114.81,12.2 U5.16 112.32,12.21 112.32,13.4 112,13.72 108.51,13.72 | 108.51,13.72 v107.31,13.72 | 108.51,13.72 108.52,13.73 U5.4 108.52,19.93 108.13,20.32 C5.1
  Bottom 0.254: J15.2 116.91,3.64 118.35,5.08 118.35,10.41 v117.34,11.43 | J15.74 98.91,3.44 97.4,4.95 97.4,11.68 99.43,13.72 | 99.43,13.72 v107.31,13.72 | J13.1 99.43,13.72
3.3V5  (via drill 0.3)